# Altium PCB discharge-tsmp.PcbDoc
Units mm, origin at the board's own origin, x right, y up, seen from the top; angles counter-clockwise.
Board outline 75.38 x 34 mm, 2 copper layers (Top Layer, Bottom Layer), stack 1.57 mm thick; 21 components, 17 nets, 55 pads, 4 vias.
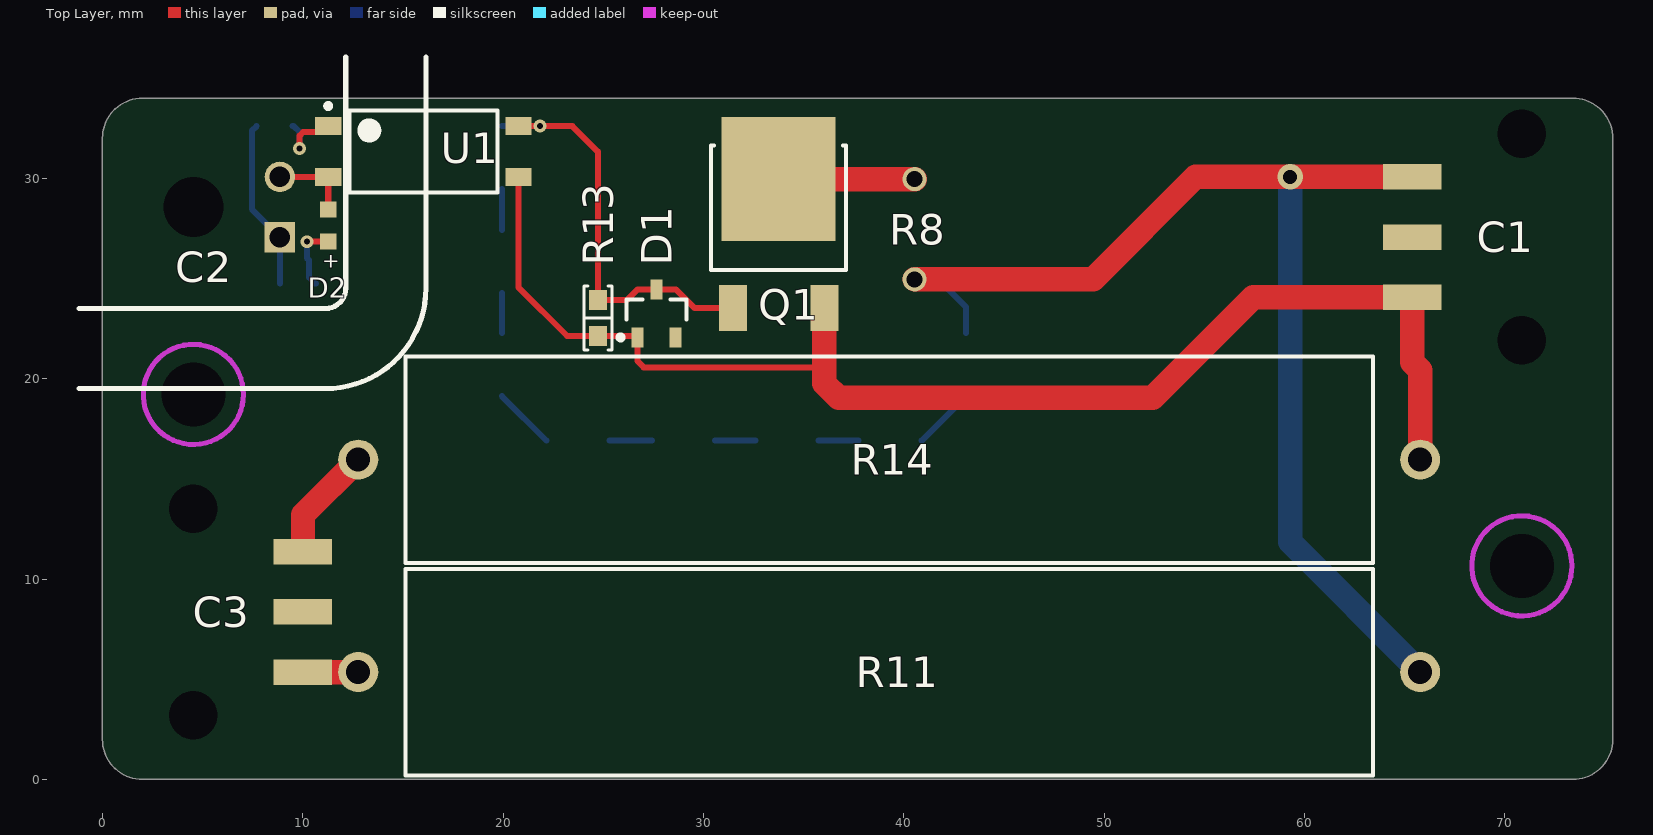
[diagram p0: Top Layer view]
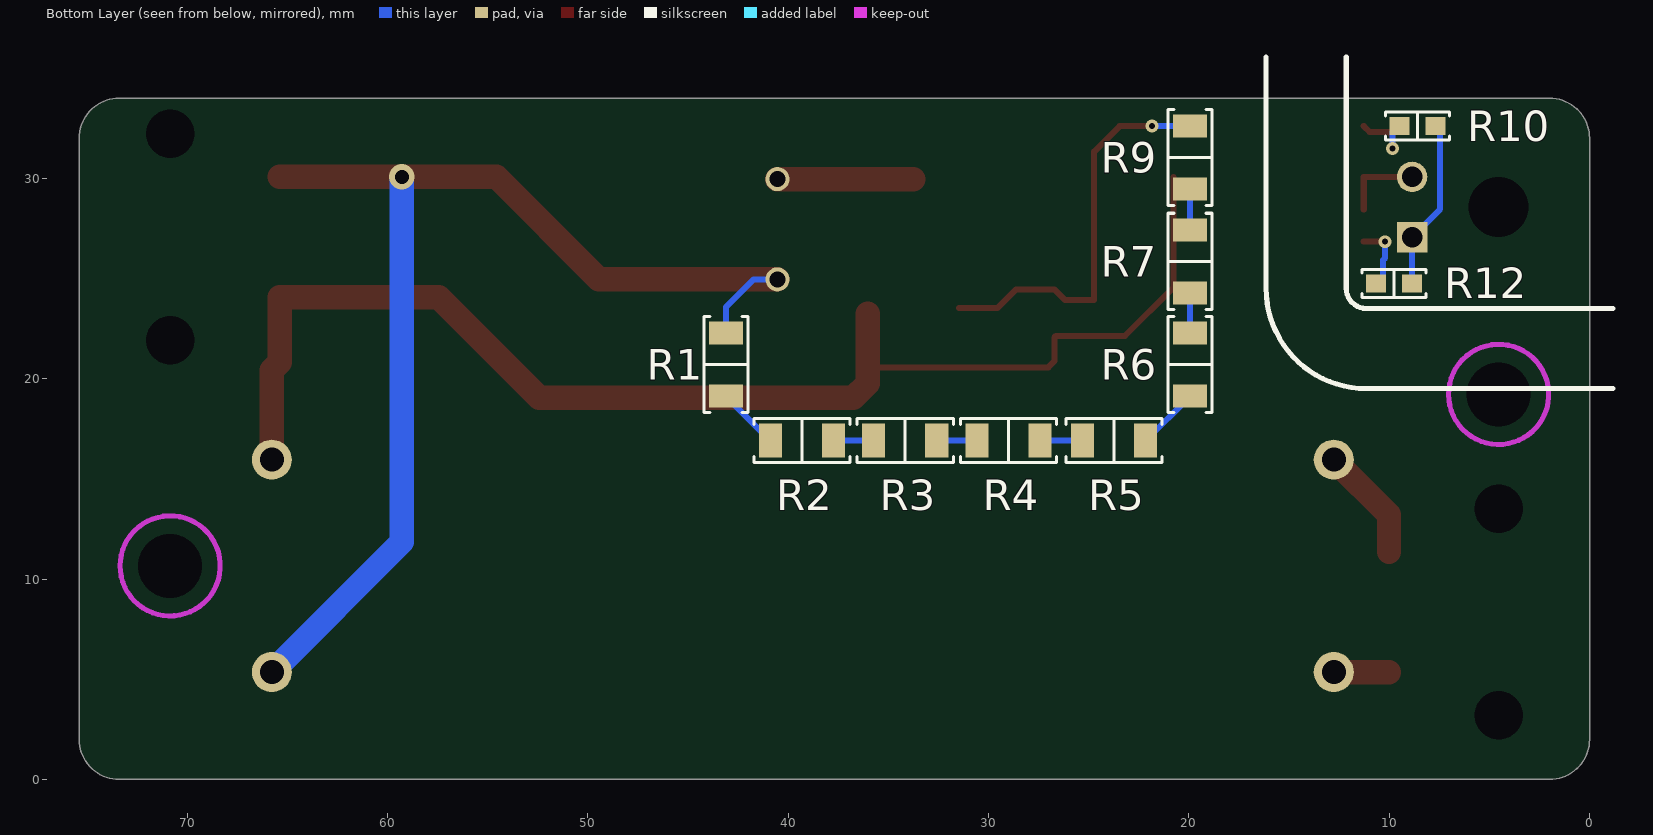
[diagram p1: Bottom Layer view, seen from below]
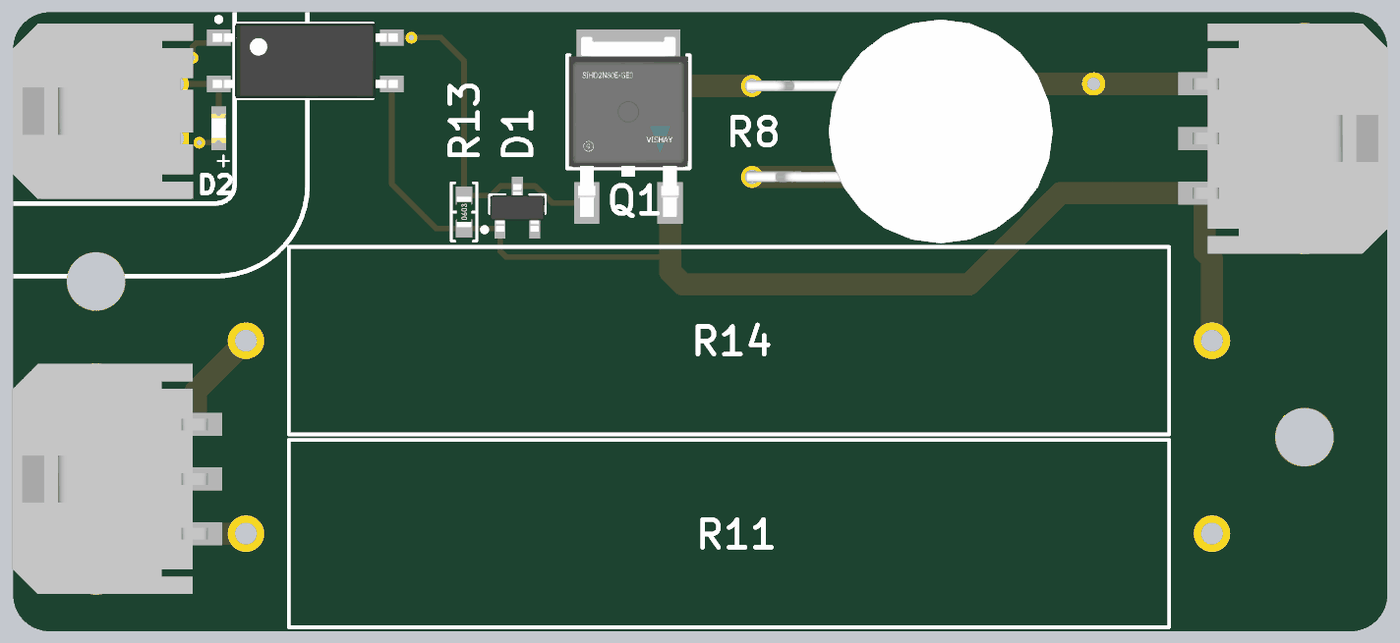
[diagram p2: 3D render of the assembled board from above, using the file's embedded part models]
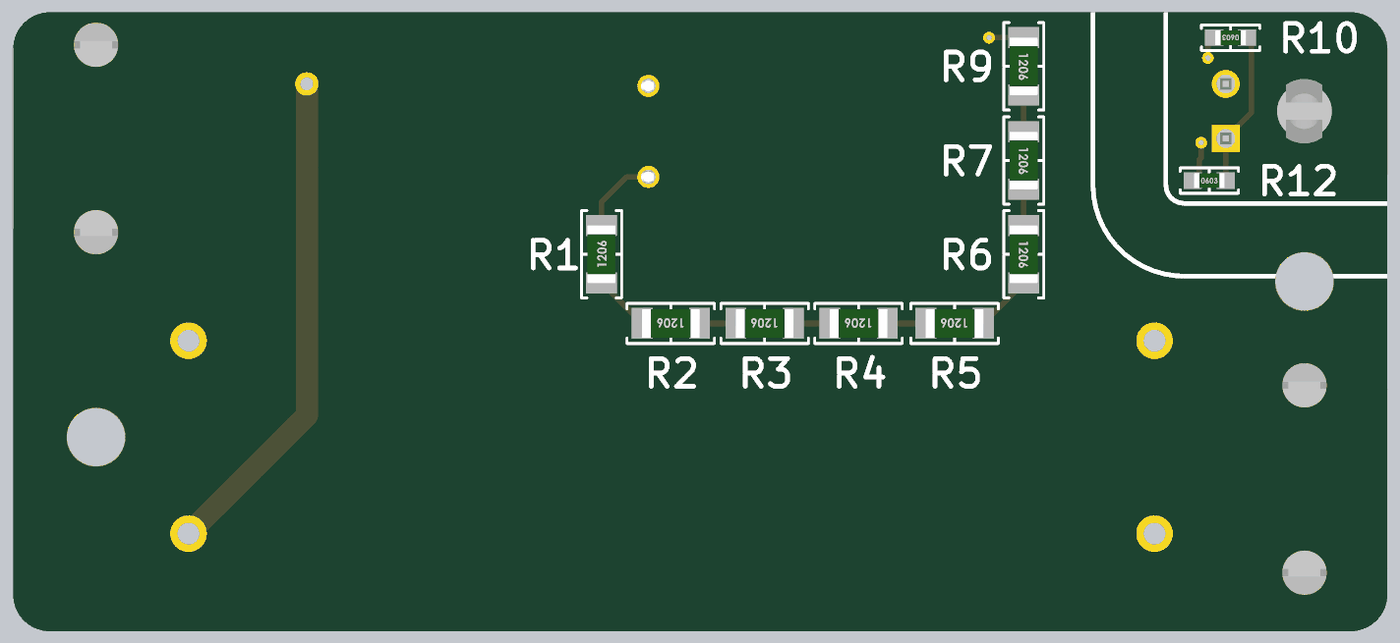
[diagram p3: 3D render of the assembled board from below, using the file's embedded part models]

## Layer stack, top to bottom
Top Solder: solder mask 0.015, Solder Resist, Dk 3.5
Top Layer: signal copper 0.035
Dielectric 1: dielectric 1.5, FR-4, Dk 4.8
Bottom Layer: signal copper 0.035
Bottom Solder: solder mask 0.015, Solder Resist, Dk 3.5

## Board outline
2,0 cw(c2,2) 0,2 0,32 cw(c2,32) 2,34 73.383,34 cw(c73.383,32) 75.383,32 75.383,2 cw(c73.383,2) 73.383,0

## Design rules (kind name [scope] priority, off if disabled: settings)
AcuteAngle [All] p1: minimum=4.50000000000000E+0001 checktracksonly=FALSE
BoardOutlineClearance [All] p1: gap=0.254 ignorepadtopadclearanceinfootprint=FALSE
Clearance Clearance_HV_Gate [InNet('TS-') vs InNet('GATE')] p1: gap=0.152 ignorepadtopadclearanceinfootprint=FALSE
Clearance Clearance_HV_VD [InNetClass('TS_VD') vs InNetClass('TS_VD')] p2: gap=2 ignorepadtopadclearanceinfootprint=FALSE
Clearance Clearance_HV [InNetClass('TS') vs InNetClass('TS')] p3: gap=3 ignorepadtopadclearanceinfootprint=TRUE
Clearance [All] p4: gap=0.152 ignorepadtopadclearanceinfootprint=FALSE
Clearance Clearance_HV_LV [InNetClass('GLVS') vs InNetClass('TS') OR InNetClass('TS_IM')] p5: gap=4 ignorepadtopadclearanceinfootprint=FALSE
ComponentClearance [All] p1: gap=0.1 collisioncheckmode=3 verticalgap=0.254 showdistances=FALSE
FanoutControl Fanout_Small [All] p1 off: bgadir=Out bgaviamode=Centered fanoutstyle=Auto fanoutdirection=Alternating viagrid=0.025 // Protel DXP Scope 1 Expression Was: (CompPinCount < 5)   Fanout_Small (Default Rule)
FanoutControl Fanout_Default [All] p2: bgadir=Out bgaviamode=Centered fanoutstyle=Auto fanoutdirection=Alternating viagrid=0.025 // Fanout_Default (Default Rule)
FanoutControl Fanout_SOIC [All] p3 off: bgadir=Out bgaviamode=Centered fanoutstyle=Auto fanoutdirection=Alternating viagrid=0.025 // Protel DXP Scope 1 Expression Was: IsSOIC   Fanout_SOIC (Default Rule)
FanoutControl Fanout_BGA [All] p4 off: bgadir=Out bgaviamode=Centered fanoutstyle=Auto fanoutdirection=Alternating viagrid=0.025 // Protel DXP Scope 1 Expression Was: IsBGA   Fanout_BGA (Default Rule)
FanoutControl Fanout_LCC [All] p5 off: bgadir=Out bgaviamode=Centered fanoutstyle=Auto fanoutdirection=Alternating viagrid=0.025 // Protel DXP Scope 1 Expression Was: IsLCC   Fanout_LCC (Default Rule)
HoleSize [All] p1: absolutevalues=TRUE maxlimit=7 minlimit=0.2 maxpercent=80.000 minpercent=20.000
MinimumAnnularRing [All] p1: minimumring=0.17
PolygonConnect [All] p1: connectstyle=Relief reliefconductorwidth=0.254 reliefentries=4 polygonreliefangle="90 Angle" airgapwidth=0.254
RoutingVias [All] p1: holewidth=0.3 width=0.64 viastyle="Through Hole" minholewidth=0.3 minwidth=0.61 maxholewidth=0.711 maxwidth=1.27
SMDEntry [All] p1 off: side=TRUE corner=TRUE anyangle=TRUE // Protel DXP Scope 1 Expression Was: not IsRoundPad
SMDToCorner [All] p1: distance=60000
SilkToSolderMaskClearance [All] p1 off: minsilkscreentomaskgap=0.254 clearancetoexposedcopper=TRUE // Protel DXP Scope 1 Expression Was: IsPad
SolderMaskExpansion [All] p1: expansion=0 istentingtop=FALSE
Width [All] p1: maxlimit=1.219 minlimit=0.152 preferedwidth=0.305
22 further rules are at their usual default settings.

## Classes and differential pairs
net class TS_VD: GATE NetR1_1 NetR2_1 NetR3_1 NetR4_1 NetR5_1 NetR6_1 NetR7_1 TS+
net class TS: GATE NetC1_2 NetQ1_4 NetR1_1 NetR2_1 NetR3_1 NetR4_1 NetR5_1 NetR6_1 NetR7_1 TS+ TS-
net class TS_IM: NetQ1_4 TS+
net class GLVS: GND NetD2_2 NetR10_2 SC_END

## Components (designator, comment, footprint, x,y, rotation, side; value= is the part's Value field where it differs from the comment)
C1 "DC_BUS" 43650-0309 70.843,27.069 r90 top
C2 "SC_IN" 43650-0200 8.86,28.569 r270 top
C3 "TSMP_OUT" 43650-0309 4.54,8.358 r270 top
D1 "4V7" SOT23 27.658,23.258 r90 top
D2 "150060GS55040" WL-SMCW_0603_H=0.7 11.271,27.639 r270 top
Q1 "SIHD2N80E-GE3" FP-T16-0236-MFG 33.75,27.714 r0 top
R1 "SMD Resistor" "STACKPOLE CSR1206" 43.108,20.707 r90 bottom value=100k
R2 "SMD Resistor" "STACKPOLE CSR1206" 39.308,16.906 r0 bottom value=100k
R3 "SMD Resistor" "STACKPOLE CSR1206" 34.157,16.906 r0 bottom value=100k
R4 "SMD Resistor" "STACKPOLE CSR1206" 29.007,16.906 r0 bottom value=100k
R5 "SMD Resistor" "STACKPOLE CSR1206" 23.739,16.906 r0 bottom value=100k
R6 "SMD Resistor" "STACKPOLE CSR1206" 19.939,20.707 r270 bottom value=100k
R7 "SMD Resistor" "STACKPOLE CSR1206" 19.939,25.857 r270 bottom value=39k
R8 "PTCEL13R501RBE" PTCEL13_H 40.536,27.458 r90 top
R9 "SMD Resistor" "STACKPOLE CSR1206" 19.939,31.034 r270 bottom value=39k
R10 "SMD Resistor" "STACKPOLE CSR0603" 8.593,32.609 r0 bottom value=1k2
R11 "40F15KE" OHMITE_40_SERIES 39.267,5.358 r180 top
R12 "SMD Resistor" "STACKPOLE CSR0603" 9.76,24.759 r180 bottom value=820
R13 "SMD Resistor" "STACKPOLE CSR0603" 24.733,23.033 r90 top value=100k
R14 "40F15KE" OHMITE_40_SERIES 39.267,15.958 r180 top
U1 "TCLT1000" VISH-SOP4L-4_V 16.021,31.339 r0 top

## Footprints (in the part's own frame and the unit in brackets; to place one, negate y for a bottom-side part, rotate by r counter-clockwise, add the part's x,y. Pads: shape width x height; smd on the part's side, far side on the other; paste and mask are expansions set on the pad)
43650-0200 [mm] "Micro-Fit 3.0 Right Angle Header, 3.00mm Pitch, Single Row, 2 Circuits"
  rect 1.524x1.524 hole 1.02: 1(1.5,0)
  round 1.524 hole 1.02: 2(-1.5,0)
  round 0 hole 3 unplated: ""(0,-4.32)
  body extent -4.83,-8.9 4.83,1, height 5.64
43650-0309 [mm] "Micro-Fit 3.0 Right-Angle Header, 3.00mm Pitch, Single Row, 3 Circuits, with PCB Press-fit Metal Retention Clip, Tin, Glow-Wire Capable, Black"
  rect 1.27x2.92 smd: 1(3,5.47) 2(0,5.47) 3(-3,5.47)
  round 0 hole 2.41: ""(-5.15,0) ""(5.15,0)
  body extent -6.32,-4.6 6.33,6.14, height 5.64
FP-T16-0236-MFG [mil]
  rect 55x90 smd paste+0 mask+0: 1(-90,-165) 3(90,-165)
  rect 224.02x243.31 smd paste+0 mask+0: 4(0,88.35)
  silkscreen extent -132,-90 132,155, body extent -136,-214 136,214, height 10
OHMITE_40_SERIES [mm] "Ohmicone ® Silicone-Ceramic Conformal  Axial Terminal Wirewound  1% and 5% Tolerance Standard"
  round 2 hole 1.2: 1(-26.5,0) 2(26.5,0)
  silkscreen extent -24.15,-5.15 24.15,5.15, body extent -24.15,-5.15 24.15,5.15, height 10.3
PTCEL13_H [mm] "Vishay PTCEL13 package horizontal"
  round 1.2 hole 0.8: 1(-2.5,0) 2(2.5,0)
  body extent -6.15,-16.5 6.15,0.3, height 6.6
SOT23 [mm] "SOT23, 3-Leads, Body 2,90x2,45mm, Pitch 0,95mm, IPC Medium Density"
  rect 1x0.6 smd: 1(-1.2,0.95) 2(-1.2,-0.95) 3(1.2,0)
  silkscreen extent -1.32,-1.5 0.7,1.92, body extent -1.3,-1.5 1.3,1.5, height 1.1
"STACKPOLE CSR0603" [mm] "Chip Resistor, 2-Leads, Body 1.60x0.80mm, IPC Medium Density"
  rect 1x0.9 smd: 1(-0.9,0) 2(0.9,0)
  silkscreen extent -1.6,-0.7 1.6,0.7, body extent -0.85,-0.4 0.85,0.4, height 0.45
"STACKPOLE CSR1206" [mm] "Chip Resistor, 2-Leads, Body 3.13x1.55mm, IPC Medium Density"
  rect 1.15x1.7 smd: 1(-1.575,0) 2(1.575,0)
  silkscreen extent -2.4,-1.1 2.4,1.1, body extent -1.6,-0.78 1.6,0.77, height 0.55
VISH-SOP4L-4_V [mm] "SOP, 4-Leads, Body 4.1x7.7mm, Pitch 2.54mm"
  rect 1.3x0.9 smd: 1(-4.75,1.27) 2(-4.75,-1.27) 3(4.75,-1.27) 4(4.75,1.27)
  silkscreen extent -4.87,-2.05 3.7,2.39, body extent -5.07,-2.05 5.07,2.05, height 2.3
WL-SMCW_0603_H=0.7 [mm] "SMD Mono-color Chip LED, body 1.6x0.8mm"
  rect 0.8x0.8 smd: 1(-0.8,0) 2(0.8,0)
  body extent -0.8,-0.4 0.8,0.4, height 0.7

## Part data
C1 C3: library part "MicroFit3.0 3-Pin", "Molex Micro-Fit 3.0 3-Pin / 600V / 8.5A"
C2: library part "MicroFit3.0 2-Pin", "Molex Micro-Fit 3.0 2-Pin / 600V / 8.5A"
D1: library part "SMD Zener Diode"
D2: library part 150060GS75000, "SMT Mono-color Chip LED Waterclear WL-SMCW, size 0603, Green, 3.2 V, 140 deg, 430 mcd", Emitting Color=Green, Forward Voltage="3.2 V", Operating Temperature="-40 to 85 degC", Chip Technology=InGaN, ComponentLink1Description=Manufacturer, ComponentLink1URL=http://www.we-online.de, ComponentLink2Description=Datasheet, ComponentLink2URL=https://katalog.we-online.de/led/datasheet/150060GS75000.pdf, Dominant Wavelength="525 nm", Luminous Intensity="430 mcd", Mounting Technology=SMT, Packaging="Tape and Reel", Part Number=150060GS75000, Peak Wavelength="515 nm", Published Date="November 2018", Publisher="Wurth Elektronik", Size=0603, Viewing Angle="140 deg"
Q1: library part CMP-02550-000080-1, "MOSFET N-CH 800V 2.8A DPAK", Continuous Drain Current=2.8A, Drain To Source Breakdown Voltage=800V, Drain To Source Resistance=2.38Ω, Gate To Source Voltage=30V, Input Capacitace At Vds="315pF @ 100V", Manufacturer=Vishay, Max Forward Diode Voltage=1.2V, Max Junction Temp=+150°C, Package=T16-0236, Power Dissipation=62.5W, Pulse Drain Current=5A, Temperature="-55°C to +150°C", Temperature Range Low=-55°C, Automotive=No, Category=Trans, ComponentLink2Description=Datasheet, ComponentLink2URL=https://www.vishay.com/docs/91987/sihd2n80e.pdf, Depletion Mode=False, Device Class L1="Discrete Semiconductors", Device Class L2=Transistors, Device Class L3=MOSFETs, Digikey Description="MOSFET N-CH 800V 2.8A DPAK", Drain To Source Voltage=800V, Footprint Url=https://www.vishay.com/docs/72594/72594.pdf, Gate Charge At Vgs="9.8nC @ 10V", Height=2.507mm, Lead Free=Yes, Manufacturer Part Number=SIHD2N80E-GE3, Number Of Channels=1, Number Of N Channels=1, Octopart=https://octopart.com/sihd2n80e-ge3-vishay-84840963, Reverse Recovery Charge=900nC, Reverse Recovery Time=278ns, RoHS=TRUE, Rthja Max=62°C/W, Temperature Range High=+150°C, Threshold Vgs Max=4V, Threshold Vgs Min=2V, Transconductance=1S, Turn Off Delay Time=19ns, Turn On Delay Time=11ns
R1 R2 R3 R4 R5 R6 R7 R9 R10 R12 R13: "Resistor with multiple footprints"
R8: "PTC Thermistors, Inrush Current Limiter and Energy Load-Dump /  / 500Ohm, 150J", Manufacturer=Vishay, Supplier Part Number 1=BC3320-ND, ComponentLink1Description=http://www.vishay.com/docs/29165/ptcel.pdf?src-supplier=Digi-Key, ComponentLink1URL=http://www.vishay.com/docs/29165/ptcel.pdf?src-supplier=Digi-Key, Manufacturer Part Number=PTCEL13R501RBE, Packaging=Bulk, Pricing 1="1=3,50000, 5=3,24600, 10=2,69700, 25=2,24760, 50=1,99800, 100=1,89810, 500=1,59840, 1000=1,49850, 5000=1,39860 (USD)", RoHS=No, Stock 1=1570, Supplier 1=Digi-Key
R11 R14: "Wirewound Resistors 10watt 15K 1% Axial", Case/Package=Axial, Manufacturer=Ohmite, Max Power Dissipation=10W, Package Quantity=25, Resistance=15k, Resistor Type=Wirewound, Supplier Part Number 1=588-40F15KE, Temperature Coefficient=20ppm/°C, Tolerance=1%, Category="Through-Hole Resistors", ComponentLink4Description=Datasheet, ComponentLink4URL=https://www.ohmite.com/assets/docs/res_40.pdf, ComponentLink5Description="Product Page", ComponentLink5URL=https://www.ohmite.com/40-series, Length=1.902inch, Manufacturer Part Number=40F15KE, Mount="Through Hole", Number of Terminations=2, Packaging=Bulk, Power Rating=10W, Pricing 1="1=2,89000, 10=2,61000, 50=2,14000, 100=2,06000, 1000=1,35000, 10000=1,32000 (USD)", RoHS=Yes, RoHS Compliant=Yes, Series="Ohmicone® 40", Stock 1=619, Supplier 1=Mouser, Termination=Axial
U1: library part CMP-2000-07234-1, "Optocoupler, Phototransistor Output, VCEO 70 V, -55 to 100 degC, 4-Pin SOP (SOP4L), RoHS, Tape and Reel", Manufacturer=Vishay/Semiconductor, Maximum Collector Current=50mA, Maximum Collector Emitter Saturation Voltage=300mV, Maximum Collector Emitter Voltage=70V, Maximum Current Transfer Ratio @ Current=600%, Maximum Forward Voltage=1.6V, Maximum Input Current=60mA, Maximum Power Dissipation=250mW, Maximum Reverse Voltage=6V, Minimum Isolation Voltage=5000Vrms, Operating Temperature=-40to100°C, Package=4SOP, Package Description="4-Pin Small Outline Package Integrated Circuit, Body 4.1 x 7.5 mm, Pitch 2.54 mm", Package Reference=SOP4L, Typical Forward Voltage=1.25V, Category=TransistorandPhotovoltaicOutputPhotoCouplers, Datasheet URL=http://www.vishay.com/docs/83515/tclt1000.pdf, Datasheet Version="Rev. 2.9, 12/2015", Input Type=DC, Manufacturer URL=http://www.vishay.com/, Mounting Technology=SurfaceMount, Number of Channels per Chip=1, Output Type=DC, Packaging=Tape&Reel

## Free pads (board coordinates)
  round 0 hole 3.2: ""(4.54,19.216) ""(70.843,10.658)

## Via types
v1: diameter 0.64, hole 0.3, Top Layer to Bottom Layer, 3 vias
v2: diameter 1.27, hole 0.711, Top Layer to Bottom Layer, 1 vias

## Nets (pads, with @x,y where several pads share a name; then routed paths per layer and width w, separated by ;. In a path a pad name is that pad's centre, name@x,y a point inside that pad or via, vN(x,y) a via of type N, cw(c..) or ccw(c..) an arc to the next point about the centre after c; other vN are vias at no path point)
GATE: D1.3 Q1.1 R9.1 R13.2 U1.4 | length 21.1
  Top Layer w0.305: U1.4 v1(21.844,32.609) 23.451,32.609 24.733,31.327 R13.2 26.183,23.933 26.708,24.458 D1.3 28.624,24.458 29.559,23.523 Q1.1
  Bottom Layer w0.305: R9.1 v1(21.844,32.609)
GND: C2.2 D2.1 U1.2 | length 4
  Top Layer w0.305: C2.2 U1.2 D2.1
NetC3_1: C3.1 R11.2 | length 2.8
  Top Layer w1.219: C3.1 R11.2
NetC3_3: C3.3 R14.2 | length 5.7
  Top Layer w1.219: C3.3 10.01,13.201 R14.2
NetD2_2: D2.2 R12.1 | length 3.4
  Top Layer w0.305: v1(10.206,26.839) D2.2
  Bottom Layer w0.305: v1(10.206,26.839) 10.206,26.016 10.312,25.909 10.312,25.057 10.61,24.759 R12.1
NetQ1_4: Q1.4 R8.2 | length 6.8
  Top Layer w1.219: Q1.4 R8.2
NetR1_1: R1.1 R2.2 | length 3.1
  Bottom Layer w0.305: R2.2 R1.1
NetR2_1: R2.1 R3.2 | length 2
  Bottom Layer w0.305: R3.2 R2.1
NetR3_1: R3.1 R4.2 | length 2
  Bottom Layer w0.305: R4.2 R3.1
NetR4_1: R4.1 R5.2 | length 2.1
  Bottom Layer w0.305: R5.2 R4.1
NetR5_1: R5.1 R6.2 | length 3.1
  Bottom Layer w0.305: R6.2 R5.1
NetR6_1: R6.1 R7.2 | length 2
  Bottom Layer w0.305: R6.1 R7.2
NetR7_1: R7.1 R9.2 | length 2
  Bottom Layer w0.305: R7.1 R9.2
NetR10_2: R10.2 U1.1 | length 3.6
  Top Layer w0.305: v1(9.841,31.496) 9.841,32.133 10.019,32.311 10.973,32.311 U1.1
  Bottom Layer w0.305: R10.2 9.543,32.609 9.841,32.311 v1(9.841,31.496)
SC_END: C2.1 R10.1 R12.2 | length 8.5
  Bottom Layer w0.305: R10.1 7.461,32.377 7.461,28.468 C2.1 R12.2
TS+: C1.1 R1.2 R8.1 R11.1 | length 58.8
  Top Layer w1.219: R8.1 49.443,24.958 54.554,30.069 v2(59.277,30.069) C1.1
  Bottom Layer w0.305: R8.1 41.717,24.958 43.108,23.567 R1.2
  Bottom Layer w1.219: v2(59.277,30.069) 59.277,11.848 R11.1
TS-: C1.3 D1.1 Q1.3 R13.1 R14.1 U1.3 | length 66.6
  Top Layer w0.305: U1.3 20.771,24.549 23.187,22.133 R13.1 26.633,22.133 D1.1 26.708,20.879 27.019,20.568 35.909,20.568 36.036,20.695
  Top Layer w1.219: Q1.3@36.036,23.235 36.036,20.695 36.036,19.758 36.75,19.044 52.419,19.044 57.444,24.069 C1.3 65.373,20.822 65.767,20.428 R14.1
pads on no net: C1. C1.2 C2. C3. C3.2 D1.2

## Keep-outs
Keep-Out Layer:
  circle w0.254: c70.843,10.658 r2.5
  circle w0.254: c4.54,19.216 r2.5

## Other copper
Top Layer:
  text "TODO: LOGO AND VERSION/NAME" at 21.717,51.054 h1.52

## Silkscreen, mask and mechanical layers (free items; w line width, h text height)
Top Overlay:
  lines w0.254: -1.159,19.505 11.144,19.505 ccw(c11.144,24.505) 16.144,24.505 16.144,36.046 ; -1.159,23.505 11.144,23.505 ccw(c11.144,24.505) 12.144,24.505 12.144,36.046
Bottom Overlay:
  lines w0.254: -1.159,19.505 11.144,19.505 ccw(c11.144,24.505) 16.144,24.505 16.144,36.046 ; -1.159,23.505 11.144,23.505 ccw(c11.144,24.505) 12.144,24.505 12.144,36.046
Mechanical 1:
  the board outline again, w0.254

## Text inside footprints (layer, text, board x,y; h text height)
D2: Top Overlay "+" at 10.971,25.539 h0.76